# Altium PCB Speedometer_Tech.PcbDoc (part 4 of 4)
Units mm, origin at the board's own origin, x right, y up, seen from the top; angles counter-clockwise.
Board outline 309.2 x 103.7 mm, 4 copper layers (Top Layer, MidLayer1, MidLayer2, Bottom Layer), stack 0.603 mm thick; 246 components, 310 nets, 1253 pads, 701 vias.
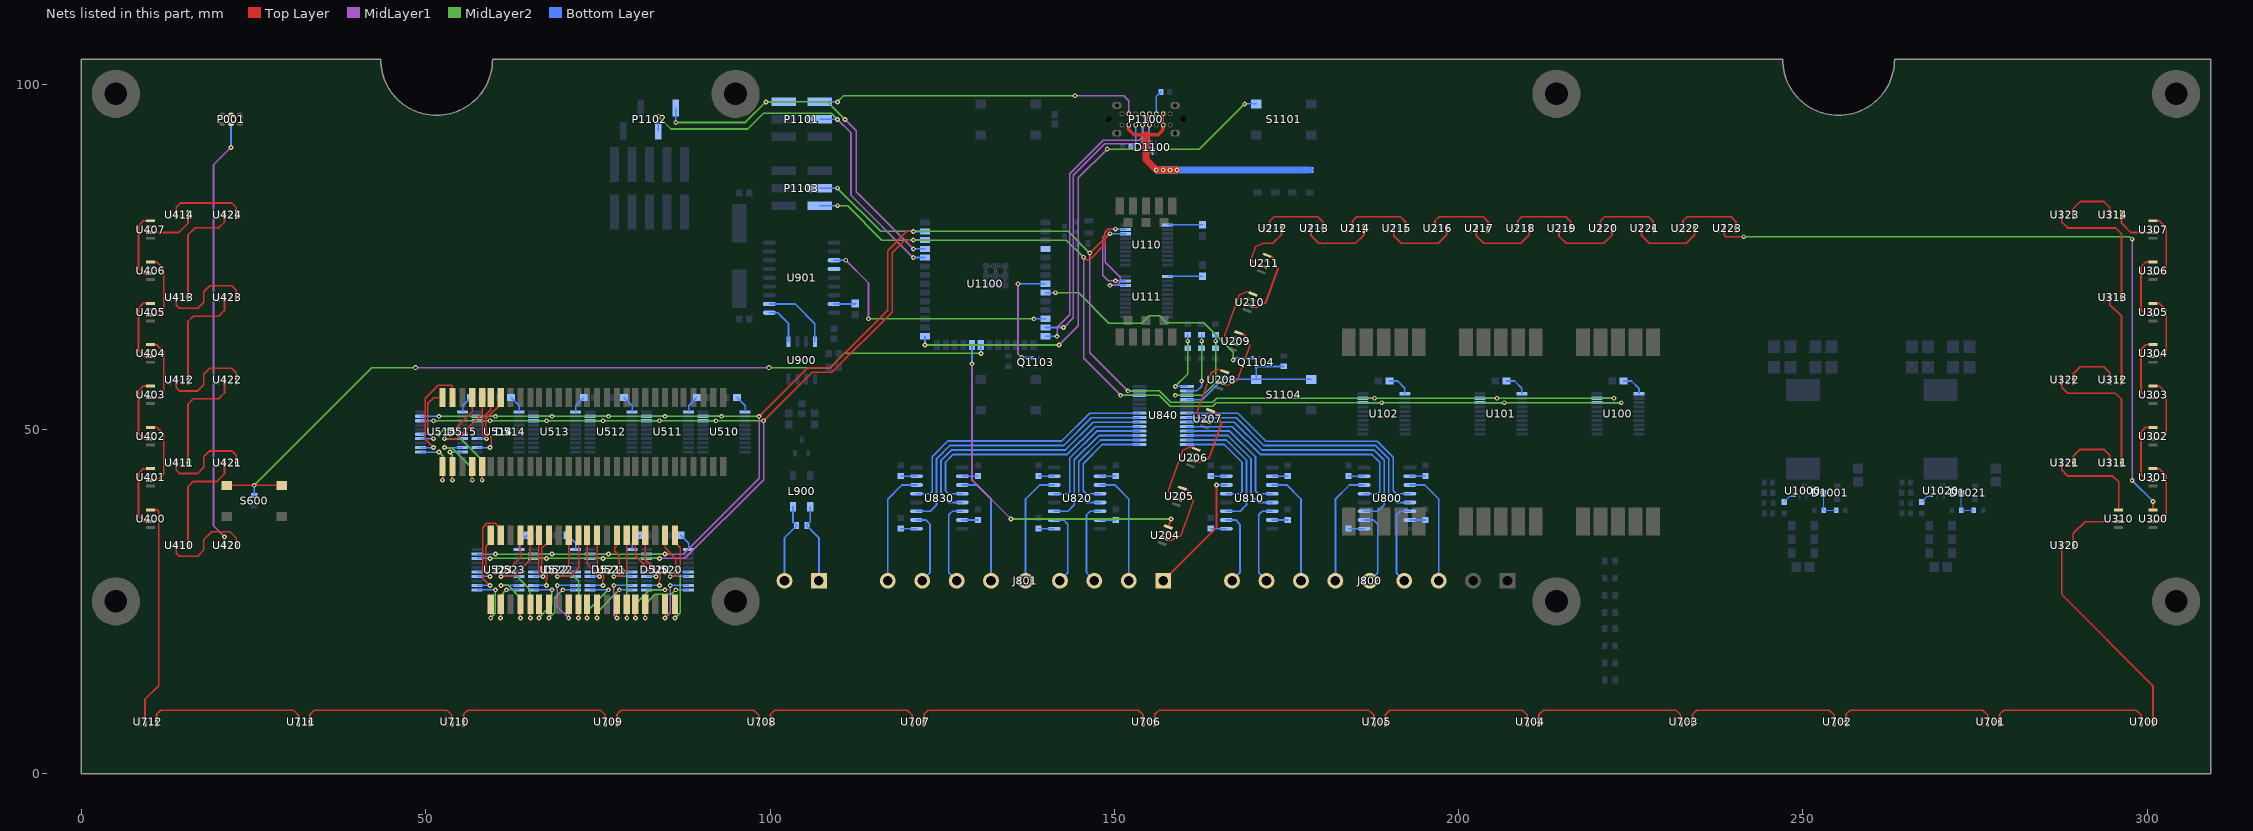
[diagram p5: the nets of this part, all layers, seen from the top]

## Via types
v1: diameter 0.7, hole 0.3, Top Layer to Bottom Layer, 568 vias
v2: diameter 0.6, hole 0.3, Top Layer to Bottom Layer, 96 vias
v3: diameter 1.27, hole 0.711, Top Layer to Bottom Layer, 33 vias
v4: diameter 0.7, hole 0.4, Top Layer to Bottom Layer, 4 vias

## Nets (pads, with @x,y where several pads share a name; then routed paths per layer and width w, separated by ;. In a path a pad name is that pad's centre, name@x,y a point inside that pad or via, vN(x,y) a via of type N, cw(c..) or ccw(c..) an arc to the next point about the centre after c; other vN are vias at no path point) (continued)
NetD514_9: D514.9 U514.12 | length 10.5
  Top Layer w0.2: v1(59.33,47.325) 59.33,47.46 59.48,47.61 59.48,48.894 59.1,49.275 59.061,49.275 58.68,49.656 58.68,51.494 59.061,51.875 59.105,51.875 60.88,53.65 D514.9@60.88,54.6
  Bottom Layer w0.2: U514.12@57.47,47.325 v1(59.33,47.325)
NetD514_10: D514.10 U514.14 | length 8
  Top Layer w0.2: 58.27,49.925 58.27,49.185 v1(58.83,48.625) ; 58.28,49.935 58.28,51.66 59.44,52.82 D514.10@59.44,54.6
  Bottom Layer w0.2: U514.14@57.47,48.625 v1(58.83,48.625)
NetD515_1: D515.1 U515.11 | length 8.9
  Top Layer w0.2: v1(52.44,42.6) D515.1@52.44,44.6
  MidLayer2 w0.2: v1(51.93,46.675) 52.44,46.165 v1(52.44,42.6)
  Bottom Layer w0.2: U515.11@49.27,46.675 v1(51.93,46.675)
NetD515_2: D515.2 U515.10 | length 8.1
  Top Layer w0.2: v1(53.88,42.6) D515.2@53.88,44.6
  MidLayer2 w0.2: v1(53.51,46.675) 53.88,46.305 v1(53.88,42.6)
  Bottom Layer w0.2: v1(53.51,46.675) U515.10@55.37,46.675
NetD515_4: D515.4 U515.9 | length 11.7
  Top Layer w0.2: v1(56.76,42.6) D515.4@56.76,44.6
  MidLayer2 w0.2: v1(52.71,47.325) 53.78,47.325 56.76,44.344 v1(56.76,42.6)
  Bottom Layer w0.2: v1(52.71,47.325) U515.9@55.37,47.325
NetD515_5: D515.5 U515.15 | length 15.9
  Top Layer w0.2: v1(58.2,42.6) D515.5@58.2,44.6
  MidLayer2 w0.2: v1(51.93,49.275) 52.58,49.925 53.241,49.925 53.78,49.925 58.2,45.504 v1(58.2,42.6)
  Bottom Layer w0.2: U515.15@49.27,49.275 v1(51.93,49.275)
NetD515_6: D515.6 U515.7 | length 12
  Top Layer w0.2: v1(52.71,48.625) 54.57,48.625 58.2,52.255 D515.6@58.2,54.6
  Bottom Layer w0.2: v1(52.71,48.625) U515.7@55.37,48.625
NetD515_7: D515.7 U515.6 | length 8.5
  Top Layer w0.2: v1(53.51,49.275) 56.76,52.525 D515.7@56.76,54.6
  Bottom Layer w0.2: v1(53.51,49.275) U515.6@55.37,49.275
NetD515_9: D515.9 U515.12 | length 16
  Top Layer w0.2: v1(51.13,47.325) 49.916,48.539 49.916,54.488 51.816,56.388 53.721,56.388 53.848,56.261 53.848,54.632 D515.9@53.88,54.6
  Bottom Layer w0.2: U515.12@49.27,47.325 v1(51.13,47.325)
NetD515_10: D515.10 U515.14 | length 10.3
  Top Layer w0.2: 50.316,49.925 50.316,49.439 ; v1(51.13,48.625) 50.316,49.439 ; D515.10@52.44,54.6 51.171,54.6 50.316,53.745 50.316,49.439
  Bottom Layer w0.2: U515.14@49.27,48.625 v1(51.13,48.625)
NetD520_1: D520.1 U520.11 | length 11.8
  Top Layer w0.2: v1(80.44,22.6) D520.1@80.44,24.6
  MidLayer2 w0.2: v1(80.44,22.6) 80.44,24.6 82.515,26.675 v1(84.73,26.675)
  Bottom Layer w0.2: U520.11@82.07,26.675 v1(84.73,26.675)
NetD520_2: D520.2 U520.10 | length 11.1
  Top Layer w0.2: v1(81.88,22.6) D520.2@81.88,24.6
  MidLayer2 w0.2: v1(81.88,22.6) 81.88,24.56 83.32,26 85.635,26 v1(86.31,26.675)
  Bottom Layer w0.2: v1(86.31,26.675) U520.10@88.17,26.675
NetD520_4: D520.4 U520.9 | length 9.7
  Top Layer w0.2: v1(84.76,22.6) D520.4@84.76,24.6
  MidLayer1 w0.2: v1(84.76,22.6) 85.51,23.35 v1(85.51,27.325)
  Bottom Layer w0.2: v1(85.51,27.325) U520.9@88.17,27.325
NetD520_5: D520.5 U520.15 | length 14.6
  Top Layer w0.2: v1(86.2,22.6) D520.5@86.2,24.6
  MidLayer2 w0.2: v1(84.73,29.275) 85.38,29.925 86.58,29.925 86.96,29.544 86.96,23.36 v1(86.2,22.6)
  Bottom Layer w0.2: U520.15@82.07,29.275 v1(84.73,29.275)
NetD520_6: D520.6 U520.7 | length 10.2
  Top Layer w0.2: v1(85.51,28.625) 86.58,28.625 86.96,29.006 86.96,32.794 86.55,33.204 86.55,34.25 D520.6@86.2,34.6
  Bottom Layer w0.2: v1(85.51,28.625) U520.7@88.17,28.625
NetD520_7: D520.7 U520.6 | length 7.8
  Top Layer w0.2: D520.7@84.76,34.6 84.76,32.764 86.31,31.214 v1(86.31,29.275)
  Bottom Layer w0.2: v1(86.31,29.275) U520.6@88.17,29.275
NetD520_9: D520.9 U520.12 | length 10.1
  Top Layer w0.2: D520.9@81.88,34.6 81.88,31.056 83.661,29.275 83.7,29.275 84.08,28.894 84.08,28.278 83.93,28.128 v1(83.93,27.325)
  Bottom Layer w0.2: U520.12@82.07,27.325 v1(83.93,27.325)
NetD520_10: D520.10 U520.14 | length 8.6
  Top Layer w0.2: D520.10@80.44,34.6 80.44,31.615 v1(83.43,28.625)
  Bottom Layer w0.2: U520.14@82.07,28.625 v1(83.43,28.625)
NetD521_1: D521.1 U521.11 | length 10
  Top Layer w0.2: v1(73.44,22.6) D521.1@73.44,24.6
  MidLayer2 w0.2: v1(73.44,22.6) 73.44,23.585 v1(76.53,26.675)
  Bottom Layer w0.2: U521.11@73.87,26.675 v1(76.53,26.675)
NetD521_2: D521.2 U521.10 | length 9.3
  Top Layer w0.2: v1(74.88,22.6) D521.2@74.88,24.6
  MidLayer2 w0.2: v1(74.88,22.6) 74.88,23.445 v1(78.11,26.675)
  Bottom Layer w0.2: v1(78.11,26.675) U521.10@79.97,26.675
NetD521_4: D521.4 U521.9 | length 9.6
  Top Layer w0.2: v1(77.76,22.6) D521.4@77.76,24.6
  MidLayer1 w0.2: v1(77.31,27.325) 77.31,23.05 v1(77.76,22.6)
  Bottom Layer w0.2: v1(77.31,27.325) U521.9@79.97,27.325
NetD521_5: D521.5 U521.15 | length 14.4
  Top Layer w0.2: v1(79.2,22.6) D521.5@79.2,24.6
  MidLayer2 w0.2: v1(76.53,29.275) 77.18,29.925 78.38,29.925 79.2,29.104 v1(79.2,22.6)
  Bottom Layer w0.2: U521.15@73.87,29.275 v1(76.53,29.275)
NetD521_6: D521.6 U521.7 | length 10
  Top Layer w0.2: v1(77.31,28.625) 78.38,28.625 79.2,29.446 D521.6@79.2,34.6
  Bottom Layer w0.2: v1(77.31,28.625) U521.7@79.97,28.625
NetD521_7: D521.7 U521.6 | length 7.6
  Top Layer w0.2: D521.7@77.76,34.6 77.683,34.523 77.683,33.017 77.46,32.794 77.46,32.256 78.11,31.606 v1(78.11,29.275)
  Bottom Layer w0.2: v1(78.11,29.275) U521.6@79.97,29.275
NetD521_9: D521.9 U521.12 | length 9.6
  Top Layer w0.2: D521.9@74.88,34.6 74.88,29.856 75.461,29.275 75.5,29.275 75.88,28.894 75.88,28.356 75.73,28.206 v1(75.73,27.325)
  Bottom Layer w0.2: U521.12@73.87,27.325 v1(75.73,27.325)
NetD521_10: D521.10 U521.14 | length 8.1
  Top Layer w0.2: D521.10@73.44,34.6 73.44,30.415 v1(75.23,28.625)
  Bottom Layer w0.2: U521.14@73.87,28.625 v1(75.23,28.625)
NetD522_1: D522.1 U522.11 | length 9.5
  Top Layer w0.2: v1(66.44,22.6) D522.1@66.44,24.6
  MidLayer2 w0.2: v1(66.44,22.6) 68.33,24.49 v1(68.33,26.675)
  Bottom Layer w0.2: U522.11@65.67,26.675 v1(68.33,26.675)
NetD522_2: D522.2 U522.10 | length 8.8
  Top Layer w0.2: v1(67.88,22.6) D522.2@67.88,24.6
  MidLayer2 w0.2: v1(67.88,22.6) 68.73,23.45 68.73,25.495 v1(69.91,26.675)
  Bottom Layer w0.2: v1(69.91,26.675) U522.10@71.77,26.675
NetD522_4: D522.4 U522.9 | length 10.1
  Top Layer w0.2: v1(70.76,22.6) D522.4@70.76,24.6
  MidLayer1 w0.2: v1(69.11,27.325) 69.11,24.25 v1(70.76,22.6)
  Bottom Layer w0.2: v1(69.11,27.325) U522.9@71.77,27.325
NetD522_5: D522.5 U522.15 | length 14.9
  Top Layer w0.2: v1(72.2,22.6) D522.5@72.2,24.6
  MidLayer2 w0.2: v1(68.33,29.275) 68.98,29.925 69.641,29.925 70.18,29.925 72.2,27.904 v1(72.2,22.6)
  Bottom Layer w0.2: U522.15@65.67,29.275 v1(68.33,29.275)
NetD522_6: D522.6 U522.7 | length 11
  Top Layer w0.2: v1(69.11,28.625) 70.97,28.625 72.2,29.855 D522.6@72.2,34.6
  Bottom Layer w0.2: v1(69.11,28.625) U522.7@71.77,28.625
NetD522_7: D522.7 U522.6 | length 7.5
  Top Layer w0.2: v1(69.91,29.275) 70.76,30.125 D522.7@70.76,34.6
  Bottom Layer w0.2: v1(69.91,29.275) U522.6@71.77,29.275
NetD522_9: D522.9 U522.12 | length 10
  Top Layer w0.2: v1(67.53,27.325) 67.53,28.206 67.68,28.356 67.68,28.894 67.3,29.275 67.261,29.275 66.88,29.656 66.88,32.76 67.421,33.3 67.53,33.3 67.88,33.65 D522.9@67.88,34.6
  Bottom Layer w0.2: U522.12@65.67,27.325 v1(67.53,27.325)
NetD522_10: D522.10 U522.14 | length 7.6
  Top Layer w0.2: D522.10@66.44,34.6 66.44,29.215 v1(67.03,28.625)
  Bottom Layer w0.2: U522.14@65.67,28.625 v1(67.03,28.625)
NetD523_1: D523.1 U523.11 | length 9
  Top Layer w0.2: v1(59.44,22.6) D523.1@59.44,24.6
  MidLayer2 w0.2: v1(59.44,22.6) 60.13,23.29 v1(60.13,26.675)
  Bottom Layer w0.2: U523.11@57.47,26.675 v1(60.13,26.675)
NetD523_2: D523.2 U523.10 | length 8.3
  Top Layer w0.2: v1(60.88,22.6) D523.2@60.88,24.6
  MidLayer2 w0.2: v1(60.88,22.6) 60.88,25.845 v1(61.71,26.675)
  Bottom Layer w0.2: v1(61.71,26.675) U523.10@63.57,26.675
NetD523_4: D523.4 U523.9 | length 11.2
  Top Layer w0.2: v1(63.76,22.6) D523.4@63.76,24.6
  MidLayer2 w0.2: v1(60.91,27.325) 61.98,27.325 63.76,25.544 v1(63.76,22.6)
  Bottom Layer w0.2: v1(60.91,27.325) U523.9@63.57,27.325
NetD523_5: D523.5 U523.15 | length 15.4
  Top Layer w0.2: v1(65.2,22.6) D523.5@65.2,24.6
  MidLayer2 w0.2: v1(60.13,29.275) 60.78,29.925 61.98,29.925 65.2,26.704 v1(65.2,22.6)
  Bottom Layer w0.2: U523.15@57.47,29.275 v1(60.13,29.275)
NetD523_6: D523.6 U523.7 | length 11.5
  Top Layer w0.2: v1(60.91,28.625) 62.77,28.625 65.2,31.055 D523.6@65.2,34.6
  Bottom Layer w0.2: v1(60.91,28.625) U523.7@63.57,28.625
NetD523_7: D523.7 U523.6 | length 8
  Top Layer w0.2: v1(61.71,29.275) 63.76,31.325 D523.7@63.76,34.6
  Bottom Layer w0.2: v1(61.71,29.275) U523.6@63.57,29.275
NetD523_9: D523.9 U523.12 | length 14.8
  Top Layer w0.2: v1(59.33,27.325) 58.27,28.385 58.27,28.801 58.28,28.811 58.28,35.714 58.888,36.322 60.071,36.322 60.493,35.9 60.53,35.9 60.88,35.55 D523.9@60.88,34.6
  Bottom Layer w0.2: U523.12@57.47,27.325 v1(59.33,27.325)
NetD523_10: D523.10 U523.14 | length 8.5
  Top Layer w0.2: v1(59.33,28.625) 58.68,29.275 58.68,32.965 59.016,33.3 59.09,33.3 59.44,33.65 D523.10@59.44,34.6
  Bottom Layer w0.2: U523.14@57.47,28.625 v1(59.33,28.625)
NetD1001_3: D1001.3 R1001.1 R1002.2 U1000.11 | length 5.9
  Bottom Layer w0.15: U1000.11@251.4,40.75 D1001.3@253,40.75 R1001.1@253,38.25 R1002.2@254.823,38.25
NetD1021_3: D1021.3 R1021.1 R1022.2 U1020.11 | length 5.9
  Bottom Layer w0.15: U1020.11@271.4,40.75 D1021.3@273,40.75 R1021.1@273,38.25 R1022.2@274.823,38.25
NetJ800_3: J800.3 U800.3 | length 16.9
  Bottom Layer w0.254: U800.3@192.925,41.905 192.93,41.91 195.048,41.91 197.1,39.858 J800.3@197.1,28
NetJ800_4: J800.4 U800.6 | length 12.2
  Bottom Layer w0.254: J800.4@192.1,28 190.962,29.138 190.962,37.55 191.499,38.088 192.918,38.088 U800.6@192.925,38.095
NetJ800_5: J800.5 U800.10 | length 10.9
  Bottom Layer w0.254: U800.10@186.275,36.825 187.622,36.825 188.238,36.208 188.238,29.138 J800.5@187.1,28
NetJ800_6: J800.6 U800.14 | length 16.9
  Bottom Layer w0.254: J800.6@182.105,27.995 182.105,39.853 184.157,41.905 U800.14@186.275,41.905
NetJ800_7: J800.7 U810.3 | length 16.9
  Bottom Layer w0.254: U810.3@172.925,41.905 172.93,41.91 175.048,41.91 177.1,39.858 J800.7@177.1,28
NetJ800_8: J800.8 U810.6 | length 12.2
  Bottom Layer w0.254: J800.8@172.1,28 170.962,29.138 170.962,37.55 171.499,38.088 172.918,38.088 U810.6@172.925,38.095
NetJ800_9: J800.9 U810.10 | length 10.9
  Bottom Layer w0.254: U810.10@166.275,36.825 167.622,36.825 168.238,36.208 168.238,29.138 J800.9@167.1,28
NetJ801_1: J801.1 U810.14 | length 18.5
  Top Layer w0.254: J801.1@157.1,28 164.85,35.75 v1(164.85,41.905)
  Bottom Layer w0.254: v1(164.85,41.905) U810.14@166.275,41.905
NetJ801_2: J801.2 U820.3 | length 16.9
  Bottom Layer w0.254: U820.3@147.925,41.905 147.93,41.91 150.048,41.91 152.1,39.858 J801.2@152.1,28
NetJ801_3: J801.3 U820.6 | length 12.2
  Bottom Layer w0.254: J801.3@147.1,28 145.962,29.138 145.962,37.55 146.499,38.088 147.918,38.088 U820.6@147.925,38.095
NetJ801_4: J801.4 U820.10 | length 10.9
  Bottom Layer w0.254: U820.10@141.275,36.825 142.622,36.825 143.238,36.208 143.238,29.138 J801.4@142.1,28
NetJ801_5: J801.5 U820.14 | length 16.9
  Bottom Layer w0.254: J801.5@137.1,28 137.1,39.848 139.152,41.9 U820.14@141.27,41.9
NetJ801_6: J801.6 U830.3 | length 16.9
  Bottom Layer w0.254: U830.3@127.925,41.905 127.93,41.91 130.048,41.91 132.1,39.858 J801.6@132.1,28
NetJ801_7: J801.7 U830.6 | length 12.2
  Bottom Layer w0.254: J801.7@127.1,28 125.962,29.138 125.962,37.55 126.499,38.088 127.918,38.088 U830.6@127.925,38.095
NetJ801_8: J801.8 U830.10 | length 10.9
  Bottom Layer w0.254: U830.10@121.275,36.825 122.622,36.825 123.238,36.208 123.238,29.138 J801.8@122.1,28
NetJ801_9: J801.9 U830.14 | length 16.9
  Bottom Layer w0.254: J801.9@117.1,28 117.1,39.848 119.152,41.9 U830.14@121.27,41.9
NetP001_2: P001.2 U420.3 | length 63.6
  Top Layer w0.254: U420.3@20.775,33.15 v1(20.775,34.37)
  MidLayer1 w0.254: v1(20.775,34.37) 19.177,35.968 19.177,88.392 v1(21.717,90.932) ; P001.2@21.717,94.992 P001.2@21.725,95
  Bottom Layer w0.254: v1(21.717,90.932) P001.2@21.717,94.992
NetP1100_A5: P1100.A5 R1101.1 | length 3.5
  Bottom Layer w0.254: R1101.1@152.415,91 152.415,91.064 152.656,91.304 152.719,91.304 153.1,91.685 P1100.A5@153.1,94.17
NetP1100_B5: P1100.B5 R1102.1 | length 3.5
  Bottom Layer w0.254: P1100.B5@156.1,95.82 156.1,98.315 156.481,98.696 156.544,98.696 156.785,98.936 R1102.1@156.785,99
NetQ1103_1: Q1103.1 U1100.8 | length 16.5
  MidLayer1 w0.254: v1(136.017,71.12) 136.017,60.939 v1(136.558,60.397)
  Bottom Layer w0.254: v1(136.017,71.12) 136.027,71.11 U1100.8@140,71.11 ; v1(136.558,60.397) Q1103.1@138.075,60.397
NetQ1104_1: Q1104.1 U1100.9 | length 35.8
  MidLayer2 w0.2: v1(141.479,69.825) 144.805,69.825 149.225,65.405 154.005,65.405 155.048,66.448 156.587,66.448 157.574,65.462 162.956,65.462 167.259,61.158 v1(167.259,60.071)
  Bottom Layer w0.2: U1100.9@140,69.84 v1@141.479,69.84 ; v1(167.259,60.071) 167.3,60.071 167.626,60.397 Q1104.1@170.125,60.397
NetQ1104_3: Q1104.3 R1104.1 S1104.3 S1104.4 U840.18 | length 25.1
  Bottom Layer w0.254: U840.18@160.55,54.275 162.775,54.275 165.75,57.25 S1104.3@170.625,57.25 ; R1104.1@174.6,59.15 174.552,59.102 Q1104.3@170.625,59.102 S1104.3@170.625,57.25 ; S1104.4@178.575,57.25 S1104.3@170.625,57.25
NetR100_1: R100.1 U100.1 | length 3.5
  Bottom Layer w0.254: R100.1@223.949,57 225.108,57 226.183,55.925 U100.1@226.183,55.15
NetR101_1: R101.1 U101.1 | length 3.5
  Bottom Layer w0.254: R101.1@206.949,57 208.108,57 209.183,55.925 U101.1@209.183,55.15
NetR102_1: R102.1 U102.1 | length 3.5
  Bottom Layer w0.254: R102.1@189.949,57 191.133,57 192.109,56.024 192.183,55.95 U102.1@192.183,55.15
NetR110_1: R110.1 U110.1 | length 5.1
  Bottom Layer w0.2: U110.1@157.736,79.68 162.811,79.68 R110.1@162.814,79.682
NetR111_1: R111.1 U111.1 | length 5.1
  Bottom Layer w0.2: U111.1@157.736,72.187 162.791,72.187 R111.1@162.814,72.21
NetR510_1: R510.1 U510.1 | length 2.6
  Bottom Layer w0.2: R510.1@95.186,54.6 95.222,54.6 95.653,54.169 95.653,54.132 96.37,53.415 U510.1@96.37,52.525
NetR511_1: R511.1 U511.1 | length 2.6
  Bottom Layer w0.2: U511.1@88.17,52.525 88.17,53.416 88.887,54.132 88.887,54.169 89.318,54.6 R511.1@89.355,54.6
NetR512_1: R512.1 U512.1 | length 2.6
  Bottom Layer w0.2: R512.1@78.786,54.6 78.822,54.6 79.253,54.169 79.253,54.132 79.97,53.415 U512.1@79.97,52.525
NetR513_1: R513.1 U513.1 | length 2.6
  Bottom Layer w0.2: U513.1@71.77,52.525 71.77,53.415 72.487,54.132 72.487,54.169 72.918,54.6 R513.1@72.955,54.6
NetR514_1: R514.1 U514.1 | length 2.6
  Bottom Layer w0.2: R514.1@62.386,54.6 62.422,54.6 62.853,54.169 62.853,54.132 63.57,53.415 U514.1@63.57,52.525
NetR515_1: R515.1 U515.1 | length 2.6
  Bottom Layer w0.2: U515.1@55.37,52.525 55.37,53.415 56.087,54.132 56.087,54.169 56.518,54.6 R515.1@56.555,54.6
NetR520_1: R520.1 U520.1 | length 2.6
  Bottom Layer w0.2: R520.1@86.986,34.6 87.022,34.6 87.453,34.169 87.453,34.132 88.17,33.415 U520.1@88.17,32.525
NetR521_1: R521.1 U521.1 | length 2.6
  Bottom Layer w0.2: U521.1@79.97,32.525 79.97,33.415 80.687,34.132 80.687,34.169 81.118,34.6 R521.1@81.155,34.6
NetR522_1: R522.1 U522.1 | length 2.6
  Bottom Layer w0.2: R522.1@70.586,34.6 70.622,34.6 71.053,34.169 71.053,34.132 71.77,33.415 U522.1@71.77,32.525
NetR523_1: R523.1 U523.1 | length 2.6
  Bottom Layer w0.2: U523.1@63.57,32.525 63.57,33.415 64.287,34.132 64.287,34.169 64.718,34.6 R523.1@64.755,34.6
NetR600_2: R600.2 S600.1 S600.2 U1100.21 | length 124.1
  Top Layer w0.2: S600.1@21.125,41.85 v1(25.1,41.85) S600.2@29.075,41.85
  MidLayer1 w0.2: v4(48.514,58.943) v4(99.837,58.943)
  MidLayer2 w0.2: v1(25.1,41.85) 42.193,58.943 v4(48.514,58.943) ; v4(99.837,58.943) 108.727,58.943 110.779,60.995 v1(130.615,60.995)
  Bottom Layer w0.2: R600.2@25.1,40.35 v1(25.1,41.85)
  Bottom Layer w0.254: v1(130.615,60.995) U1100.21@130.615,62.24
NetR800_2: R800.2 U800.2 | length 2.3
  Bottom Layer w0.254: U800.2@192.925,43.175 R800.2@195.2,43.175
NetR801_2: R801.2 U800.7 | length 2.3
  Bottom Layer w0.254: U800.7@192.925,36.825 195.181,36.825 R801.2@195.2,36.806
NetR802_2: R802.2 U800.9 | length 2.3
  Bottom Layer w0.254: R802.2@184,35.555 U800.9@186.275,35.555
NetR803_2: R803.2 U800.15 | length 2.3
  Bottom Layer w0.254: R803.2@184,43.175 U800.15@186.275,43.175
NetR810_2: R810.2 U810.2 | length 2.3
  Bottom Layer w0.254: U810.2@172.925,43.175 R810.2@175.2,43.175
NetR811_2: R811.2 U810.7 | length 2.3
  Bottom Layer w0.254: U810.7@172.925,36.825 175.181,36.825 R811.2@175.2,36.806
NetR812_2: R812.2 U810.9 | length 2.3
  Bottom Layer w0.254: R812.2@164,35.555 U810.9@166.275,35.555
NetR813_2: R813.2 U810.15 | length 2.3
  Bottom Layer w0.254: R813.2@164,43.175 U810.15@166.275,43.175
NetR820_2: R820.2 U820.2 | length 2.3
  Bottom Layer w0.254: U820.2@147.925,43.175 R820.2@150.2,43.175
NetR821_2: R821.2 U820.7 | length 2.3
  Bottom Layer w0.254: U820.7@147.925,36.825 150.181,36.825 R821.2@150.2,36.806
NetR822_2: R822.2 U820.9 | length 2.3
  Bottom Layer w0.254: R822.2@139,35.555 U820.9@141.275,35.555
NetR823_2: R823.2 U820.15 | length 2.3
  Bottom Layer w0.254: R823.2@139,43.175 U820.15@141.275,43.175
NetR830_2: R830.2 U830.2 | length 2.3
  Bottom Layer w0.254: U830.2@127.925,43.175 R830.2@130.2,43.175
NetR831_2: R831.2 U830.7 | length 2.3
  Bottom Layer w0.254: U830.7@127.925,36.825 130.181,36.825 R831.2@130.2,36.806
NetR832_2: R832.2 U830.9 | length 2.3
  Bottom Layer w0.254: R832.2@119,35.555 U830.9@121.275,35.555
NetR833_2: R833.2 U830.15 | length 2.3
  Bottom Layer w0.254: R833.2@119,43.175 U830.15@121.275,43.175
NetR840_1: R840.1 R843.2 U840.15 | length 10.9
  MidLayer2 w0.254: v1(158.855,56.225) 160.655,58.025 v1(160.655,62.779)
  Bottom Layer w0.254: v1(158.855,56.225) U840.15@160.55,56.225 ; R843.2@160.655,61.806 v1(160.655,62.779) R840.1@160.655,63.735
NetR841_1: R841.1 R844.2 U840.16 | length 10.9
  MidLayer2 w0.254: v1(162.687,57.023) v1(162.687,62.779)
  Bottom Layer w0.254: U840.16@160.55,55.575 162.001,55.575 162.687,56.261 v1(162.687,57.023) ; R844.2@162.687,61.806 v1(162.687,62.779) R841.1@162.687,63.735
NetR842_1: R842.1 R845.2 U840.17 | length 16.3
  MidLayer2 w0.254: v1(158.855,54.925) 162.875,54.925 164.719,56.769 v1(164.719,62.779)
  Bottom Layer w0.254: v1(158.855,54.925) U840.17@160.55,54.925 ; R845.2@164.719,61.806 v1(164.719,62.779) R842.1@164.719,63.735
NetR903_1: R903.1 U901.17 | length 3.1
  Bottom Layer w0.254: U901.17@109.3,68.19 112.333,68.19 R903.1@112.395,68.252
NetR1003_2: R1003.2 U1000.3 | length 1.7
  Bottom Layer w0.15: R1003.2@247.269,39.45 247.269,39.5 247.594,39.825 247.644,39.825 248.069,40.25 U1000.3@248.6,40.25
NetR1023_2: R1023.2 U1020.3 | length 1.7
  Bottom Layer w0.15: R1023.2@267.269,39.45 267.269,39.5 267.594,39.825 267.644,39.825 268.069,40.25 U1020.3@268.6,40.25
NetS1101_3: S1101.3 U1100.27 | length 76.4
  MidLayer1 w0.2: v1(141.971,62.245) 144.78,65.054 144.78,86.487 v1(148.971,90.678)
  MidLayer2 w0.2: v1(148.971,90.678) 162.358,90.678 v1(168.93,97.25)
  MidLayer2 w0.254: v1(122.5,62.245) v1(141.971,62.245)
  Bottom Layer w0.254: v1(122.5,62.245) U1100.27@122.5,63.49 ; v1(168.93,97.25) S1101.3@170.625,97.25
NetU204_1: U204.1 U1100.22 | length 52.1
  Top Layer w0.254: U204.1@157.819,35.803 v1(158.236,36.95)
  MidLayer1 w0.254: v1(129.345,59.495) 129.345,42.613 v1(135.001,36.957)
  MidLayer2 w0.254: v1(135.001,36.957) 135.008,36.95 v1(158.236,36.95)
  Bottom Layer w0.254: v1(129.345,59.495) U1100.22@129.345,62.24
NetU204_3: U204.3 U205.1 | length 10.6
  Top Layer w0.254: U204.3@157.237,34.206 158.226,33.846 159.633,34.502 161.466,39.537 160.722,41.132 U205.1@159.871,41.441
NetU205_3: U205.3 U206.1 | length 10.4
  Top Layer w0.254: U205.3@159.289,39.844 158.265,40.217 157.841,41.127 159.955,46.937 160.99,47.419 U206.1@161.923,47.079
NetU206_3: U206.3 U207.1 | length 10.6
  Top Layer w0.254: U206.3@161.341,45.482 162.33,45.122 163.737,45.778 165.57,50.813 164.826,52.408 U207.1@163.975,52.717
NetU207_3: U207.3 U208.1 | length 10.4
  Top Layer w0.254: U207.3@163.393,51.12 162.369,51.493 161.962,52.365 164.097,58.23 165.094,58.695 U208.1@166.027,58.355
NetU208_3: U208.3 U209.1 | length 10.6
  Top Layer w0.254: U208.3@165.445,56.758 166.434,56.398 167.841,57.054 169.674,62.089 168.93,63.684 U209.1@168.079,63.993
NetU209_3: U209.3 U210.1 | length 10.4
  Top Layer w0.254: U209.3@167.497,62.396 166.473,62.769 166.032,63.715 168.127,69.472 169.198,69.971 U210.1@170.131,69.631
NetU210_3: U210.3 U211.1 | length 10.6
  Top Layer w0.254: U210.3@169.549,68.034 170.538,67.674 171.945,68.33 173.778,73.365 173.034,74.96 U211.1@172.183,75.269
NetU211_3: U211.3 U212.1 | length 9.3
  Top Layer w0.254: U211.3@171.601,73.672 170.168,74.193 169.895,74.781 170.519,76.496 171.6,77 173.018,77 174.275,78.257 U212.1@174.275,79.15
NetU212_3: U212.3 U213.1 | length 10.3
  Top Layer w0.254: U212.3@172.575,79.15 172.575,80.24 173.185,80.85 179.568,80.85 180.275,80.143 U213.1@180.275,79.15
NetU213_3: U213.3 U214.1 | length 10.6
  Top Layer w0.254: U213.3@178.575,79.15 178.575,78.098 179.673,77 185.03,77 186.275,78.245 U214.1@186.275,79.15
NetU214_3: U214.3 U215.1 | length 10.3
  Top Layer w0.254: U214.3@184.575,79.15 184.575,80.24 185.185,80.85 191.568,80.85 192.275,80.143 U215.1@192.275,79.15
NetU215_3: U215.3 U216.1 | length 10.6
  Top Layer w0.254: U215.3@190.575,79.15 190.575,78.098 191.673,77 197.03,77 198.275,78.245 U216.1@198.275,79.15
NetU216_3: U216.3 U217.1 | length 10.3
  Top Layer w0.254: U216.3@196.575,79.15 196.575,80.24 197.185,80.85 203.568,80.85 204.275,80.143 U217.1@204.275,79.15
NetU217_3: U217.3 U218.1 | length 10.6
  Top Layer w0.254: U217.3@202.575,79.15 202.575,78.098 203.673,77 209.03,77 210.275,78.245 U218.1@210.275,79.15
NetU218_3: U218.3 U219.1 | length 10.3
  Top Layer w0.254: U218.3@208.575,79.15 208.575,80.24 209.185,80.85 215.568,80.85 216.275,80.143 U219.1@216.275,79.15
NetU219_3: U219.3 U220.1 | length 10.7
  Top Layer w0.254: U219.3@214.575,79.15 214.575,78.033 215.608,77 221.1,77 222.275,78.175 U220.1@222.275,79.15
NetU220_3: U220.3 U221.1 | length 10.3
  Top Layer w0.254: U220.3@220.575,79.15 220.575,80.24 221.185,80.85 227.568,80.85 228.275,80.143 U221.1@228.275,79.15
NetU221_3: U221.3 U222.1 | length 10.6
  Top Layer w0.254: U221.3@226.575,79.15 226.575,78.098 227.673,77 233.03,77 234.275,78.245 U222.1@234.275,79.15
NetU222_3: U222.3 U223.1 | length 10.3
  Top Layer w0.254: U222.3@232.575,79.15 232.575,80.24 233.185,80.85 239.568,80.85 240.275,80.143 U223.1@240.275,79.15
NetU223_3: U223.3 U300.1 | length 101
  Top Layer w0.254: U223.3@238.575,79.15 238.575,78.193 238.81,77.958 v1(241.408,77.958) ; U300.1@300.85,38.275 v1(300.85,39.495)
  MidLayer1 w0.254: v1(297.815,42.53) v1(297.815,77.597)
  MidLayer2 w0.254: v1@241.419,77.958 297.443,77.958 297.804,77.597 v1(297.815,77.597)
  Bottom Layer w0.254: v1(297.815,42.53) v1(300.85,39.495)
NetU300_3: U300.3 U301.1 | length 10.4
  Top Layer w0.254: U300.3@300.85,36.575 301.902,36.575 302.768,37.441 302.768,43.262 301.755,44.275 U301.1@300.85,44.275
NetU301_3: U301.3 U302.1 | length 10.3
  Top Layer w0.254: U301.3@300.85,42.575 299.945,42.575 299.085,43.435 299.085,49.562 299.798,50.275 U302.1@300.85,50.275
NetU302_3: U302.3 U303.1 | length 10.4
  Top Layer w0.254: U302.3@300.85,48.575 301.902,48.575 302.768,49.441 302.768,55.262 301.755,56.275 U303.1@300.85,56.275
NetU303_3: U303.3 U304.1 | length 10.3
  Top Layer w0.254: U303.3@300.85,54.575 299.945,54.575 299.085,55.435 299.085,61.562 299.798,62.275 U304.1@300.85,62.275
NetU304_3: U304.3 U305.1 | length 10.4
  Top Layer w0.254: U304.3@300.85,60.575 301.902,60.575 302.768,61.441 302.768,67.262 301.755,68.275 U305.1@300.85,68.275
NetU305_3: U305.3 U306.1 | length 10.3
  Top Layer w0.254: U305.3@300.85,66.575 299.945,66.575 299.085,67.435 299.085,73.562 299.798,74.275 U306.1@300.85,74.275
NetU306_3: U306.3 U307.1 | length 10.4
  Top Layer w0.254: U306.3@300.85,72.575 301.902,72.575 302.768,73.441 302.768,79.262 301.755,80.275 U307.1@300.85,80.275
NetU307_3: U307.3 U314.1 | length 6.4
  Top Layer w0.254: U314.1@296.275,81.15 296.275,79.9 297.6,78.575 U307.3@300.85,78.575
NetU310_1: U310.1 U321.3 | length 14.1
  Top Layer w0.254: U321.3@287.575,45.15 287.575,44.098 288.478,43.195 295.006,43.195 295.85,42.351 U310.1@295.85,38.275
NetU310_3: U310.3 U320.1 | length 9
  Top Layer w0.254: U320.1@289.275,33.15 289.275,34.87 290.98,36.575 U310.3@295.85,36.575
NetU311_1: U311.1 U322.3 | length 19.7
  Top Layer w0.254: U322.3@287.575,57.15 287.575,56.098 288.441,55.232 295.402,55.232 296.268,54.366 ; U311.1@296.275,45.15 296.275,54.366
NetU311_3: U311.3 U321.1 | length 8
  Top Layer w0.254: U321.1@289.275,45.15 289.275,46.055 290.288,47.068 293.709,47.068 294.575,46.202 U311.3@294.575,45.15
NetU312_1: U312.1 U313.3 | length 12.7
  Top Layer w0.254: U313.3@294.575,69.15 294.575,68.098 296.275,66.398 U312.1@296.275,57.15
NetU312_3: U312.3 U322.1 | length 8
  Top Layer w0.254: U322.1@289.275,57.15 289.275,58.055 290.288,59.068 293.709,59.068 294.575,58.202 U312.3@294.575,57.15
NetU313_1: U313.1 U323.3 | length 19.7
  Top Layer w0.254: U323.3@287.575,81.15 287.575,80.098 288.441,79.232 295.402,79.232 296.268,78.366 ; U313.1@296.275,69.15 296.275,78.366
NetU314_3: U314.3 U323.1 | length 8
  Top Layer w0.254: U323.1@289.275,81.15 289.275,82.055 290.288,83.068 293.709,83.068 294.575,82.202 U314.3@294.575,81.15
NetU320_3: U320.3 U700.1 | length 31.1
  Top Layer w0.254: U320.3@287.575,33.15 287.575,25.988 300.831,12.732 U700.1@300.831,7.5
NetU400_1: U400.1 U712.3 | length 32.7
  Top Layer w0.254: U712.3@9.219,7.5 9.219,10.743 11.242,12.766 11.242,38.069 11.036,38.275 U400.1@10.05,38.275
NetU400_3: U400.3 U401.1 | length 10.3
  Top Layer w0.254: U400.3@10.05,36.575 9.145,36.575 8.285,37.435 8.285,43.562 8.998,44.275 U401.1@10.05,44.275
NetU401_3: U401.3 U402.1 | length 10.4
  Top Layer w0.254: U401.3@10.05,42.575 11.102,42.575 11.968,43.441 11.968,49.262 10.955,50.275 U402.1@10.05,50.275
NetU402_3: U402.3 U403.1 | length 10.3
  Top Layer w0.254: U402.3@10.05,48.575 9.145,48.575 8.285,49.435 8.285,55.562 8.998,56.275 U403.1@10.05,56.275
NetU403_3: U403.3 U404.1 | length 10.4
  Top Layer w0.254: U403.3@10.05,54.575 11.102,54.575 11.968,55.441 11.968,61.262 10.955,62.275 U404.1@10.05,62.275
NetU404_3: U404.3 U405.1 | length 10.3
  Top Layer w0.254: U404.3@10.05,60.575 9.145,60.575 8.285,61.435 8.285,67.562 8.998,68.275 U405.1@10.05,68.275
NetU405_3: U405.3 U406.1 | length 10.4
  Top Layer w0.254: U405.3@10.05,66.575 11.102,66.575 11.968,67.441 11.968,73.262 10.955,74.275 U406.1@10.05,74.275
NetU406_3: U406.3 U407.1 | length 10.3
  Top Layer w0.254: U406.3@10.05,72.575 9.145,72.575 8.285,73.435 8.285,79.562 8.998,80.275 U407.1@10.05,80.275
NetU407_3: U407.3 U414.1 | length 7.2
  Top Layer w0.254: U407.3@10.05,78.575 14.15,78.575 15.475,79.9 U414.1@15.475,81.15
NetU410_1: U410.1 U421.3 | length 16.2
  Top Layer w0.254: U410.1@15.475,33.15 15.475,41.64 16.256,42.421 19.688,42.421 20.775,43.508 U421.3@20.775,45.15
NetU410_3: U410.3 U420.1 | length 13.8
  Top Layer w0.254: U410.3@13.775,33.15 13.775,32.013 14.224,31.564 16.891,31.564 17.78,32.453 17.78,33.977 18.903,35.1 21.573,35.1 22.475,34.198 U420.1@22.475,33.15
NetU411_1: U411.1 U422.3 | length 16.4
  Top Layer w0.254: U411.1@15.475,45.15 15.475,53.64 16.256,54.421 19.939,54.421 20.775,55.257 U422.3@20.775,57.15
NetU411_3: U411.3 U421.1 | length 13.6
  Top Layer w0.254: U411.3@13.775,45.15 13.775,44.013 14.224,43.564 16.891,43.564 17.78,44.453 17.78,45.977 18.653,46.85 21.823,46.85 22.475,46.198 U421.1@22.475,45.15
NetU412_1: U412.1 U423.3 | length 16.4
  Top Layer w0.254: U412.1@15.475,57.15 15.475,65.64 16.256,66.421 19.939,66.421 20.775,67.257 U423.3@20.775,69.15
NetU412_3: U412.3 U422.1 | length 13.6
  Top Layer w0.254: U412.3@13.775,57.15 13.775,56.013 14.224,55.564 16.891,55.564 17.78,56.453 17.78,57.977 18.653,58.85 21.823,58.85 22.475,58.198 U422.1@22.475,57.15
NetU413_1: U413.1 U424.3 | length 16.2
  Top Layer w0.254: U413.1@15.475,69.15 15.475,78.213 16.51,79.248 19.893,79.248 19.909,79.232 20.775,80.098 U424.3@20.775,81.15
NetU413_3: U413.3 U423.1 | length 13.6
  Top Layer w0.254: U413.3@13.775,69.15 13.775,68.013 14.224,67.564 16.891,67.564 17.78,68.453 17.78,69.977 18.653,70.85 21.823,70.85 22.475,70.198 U423.1@22.475,69.15
NetU414_3: U414.3 U424.1 | length 11.4
  Top Layer w0.254: U414.3@13.775,81.15 13.775,82.228 14.397,82.85 21.823,82.85 22.475,82.198 U424.1@22.475,81.15
NetU700_3: U700.3 U701.1 | length 23.2
  Top Layer w0.254: U701.1@278.544,7.5 278.544,8.59 279.154,9.2 298.424,9.2 299.131,8.493 U700.3@299.131,7.5
NetU701_3: U701.3 U702.1 | length 23.2
  Top Layer w0.254: U702.1@256.257,7.5 256.257,8.59 256.867,9.2 276.137,9.2 276.844,8.493 U701.3@276.844,7.5
NetU702_3: U702.3 U703.1 | length 23.2
  Top Layer w0.254: U703.1@233.97,7.5 233.97,8.59 234.581,9.2 253.85,9.2 254.557,8.493 U702.3@254.557,7.5
NetU703_3: U703.3 U704.1 | length 23.2
  Top Layer w0.254: U704.1@211.684,7.5 211.684,8.59 212.294,9.2 231.563,9.2 232.27,8.493 U703.3@232.27,7.5
NetU704_3: U704.3 U705.1 | length 23.2
  Top Layer w0.254: U705.1@189.397,7.5 189.397,8.59 190.007,9.2 209.276,9.2 209.983,8.493 U704.3@209.983,7.5
NetU705_3: U705.3 U706.1 | length 34.3
  Top Layer w0.254: U706.1@155.875,7.5 155.875,8.59 156.485,9.2 ; 156.59,9.2 186.989,9.2 187.697,8.493 U705.3@187.697,7.5
NetU706_3: U706.3 U707.1 | length 34.3
  Top Layer w0.254: U707.1@122.353,7.5 122.353,8.59 122.963,9.2 ; 123.068,9.2 153.468,9.2 154.175,8.493 U706.3@154.175,7.5
NetU707_3: U707.3 U708.1 | length 23.2
  Top Layer w0.254: U708.1@100.066,7.5 100.066,8.59 100.676,9.2 119.946,9.2 120.653,8.493 U707.3@120.653,7.5
NetU708_3: U708.3 U709.1 | length 23.2
  Top Layer w0.254: U709.1@77.779,7.5 77.779,8.59 78.39,9.2 97.659,9.2 98.366,8.493 U708.3@98.366,7.5
NetU709_3: U709.3 U710.1 | length 23.2
  Top Layer w0.254: U710.1@55.493,7.5 55.493,8.59 56.103,9.2 75.372,9.2 76.079,8.493 U709.3@76.079,7.5
NetU710_3: U710.3 U711.1 | length 23.2
  Top Layer w0.254: U711.1@33.206,7.5 33.206,8.59 33.816,9.2 53.085,9.2 53.792,8.493 U710.3@53.792,7.5
NetU711_3: U711.3 U712.1 | length 23.2
  Top Layer w0.254: U712.1@10.919,7.5 10.919,8.59 11.529,9.2 30.798,9.2 31.505,8.493 U711.3@31.505,7.5
NetU901_12: U901.12 U1100.12 | length 37.3
  MidLayer1 w0.254: v1(110.995,74.54) 114.3,71.235 v1(114.3,66.04)
  MidLayer2 w0.254: v1(114.3,66.04) 114.31,66.03 v1(138.305,66.03)
  Bottom Layer w0.254: U901.12@109.3,74.54 v1(110.995,74.54) ; v1(138.305,66.03) U1100.12@140,66.03
RX: P1101.3 P1102.2 U1100.36 | length 59.1
  MidLayer1 w0.254: v1(109.789,95) 111.76,93.029 111.76,83.965 v1(120.805,74.92)
  MidLayer2 w0.254: v1(83.77,95.445) 85.616,93.599 96.774,93.599 99.06,95.885 108.904,95.885 v1(109.789,95)
  Bottom Layer w0.254: P1102.2@83.77,93.345 v1(83.77,95.445) ; P1101.3@107.205,95 v1(109.789,95) ; v1(120.805,74.92) U1100.36@122.5,74.92
RXCAN: U900.4 U901.2 | length 10.4
  Bottom Layer w0.254: U901.2@99.9,68.19 103.641,68.19 106.505,65.326 U900.4@106.505,62.7
SCK: U1100.4
SCL: P1103.5 U100.18 U101.18 U102.18 U110.18 U111.18 U510.18 U511.18 U512.18 U513.18 U514.18 U515.18 U520.18 U521.18 U522.18 U523.18 U840.12 U1100.38 | length 329.3
  Top Layer w0.2: v1@99.057,51.227 106.123,58.293 108.996,58.293 117.714,67.011 117.714,75.639 119.535,77.46 v1(120.805,77.46) ; v1(145.542,74.969) 145.572,74.969 145.909,74.631 146.431,74.631 148.707,76.907 148.707,77.745 v1(149.357,78.395)
  MidLayer1 w0.2: v1(83.93,31.225) 87.643,31.225 99.06,42.642 v1@99.06,51.225 ; v1(145.542,74.969) 145.542,60.288 v1(150.905,54.925) ; v1(149.357,70.902) 149.888,70.902 150.426,70.902 150.807,71.282 150.807,71.508 150.836,71.537 150.836,72.096 148.707,74.225 148.707,77.745 v1(149.357,78.395)
  MidLayer2 w0.2: v1(51.13,51.225) v1(59.33,51.225) v1(67.53,51.225) v1(75.73,51.225) v1(83.93,51.225) v1(92.13,51.225) v1(99.055,51.225) ; v1(59.33,31.225) v1(67.53,31.225) v1(75.73,31.225) v1(83.93,31.225) ; v1(109.789,82.46) 109.826,82.423 111.252,82.423 116.215,77.46 v1(120.805,77.46) 143.051,77.46 v1(145.542,74.969) ; v1(150.905,54.925) 156.53,54.925 158.115,53.34 164.282,53.34 164.792,53.85 v1(188.828,53.85) v1(206.628,53.85) v1(223.628,53.85)
  Bottom Layer w0.2: U515.18@49.27,51.225 v1(51.13,51.225) ; U523.18@57.47,31.225 v1(59.33,31.225) ; U514.18@57.47,51.225 v1(59.33,51.225) ; U522.18@65.67,31.225 v1(67.53,31.225) ; U513.18@65.67,51.225 v1(67.53,51.225) ; U521.18@73.87,31.225 v1(75.73,31.225) ; U512.18@73.87,51.225 v1(75.73,51.225) ; U520.18@82.07,31.225 v1(83.93,31.225) ; U511.18@82.07,51.225 v1(83.93,51.225) ; U510.18@90.27,51.225 v1(92.13,51.225) ; v1@149.357,70.887 U111.18@151.636,70.887 ; v1@149.357,78.38 U110.18@151.636,78.38
  Bottom Layer w0.254: P1103.5@107.205,82.46 v1(109.789,82.46) ; v1(120.805,77.46) U1100.38@122.5,77.46 ; v1(150.905,54.925) U840.12@153.65,54.925 ; U102.18@186.083,53.85 v1(188.828,53.85) ; U101.18@203.083,53.85 v1(206.628,53.85) ; U100.18@220.083,53.85 v1(223.628,53.85)
SCLK: U901.13
SDA: P1103.3 U100.19 U101.19 U102.19 U110.19 U111.19 U510.19 U511.19 U512.19 U513.19 U514.19 U515.19 U520.19 U521.19 U522.19 U523.19 U840.13 U1100.39 | length 329.4
  Top Layer w0.2: v1(98.407,51.875) 105.475,58.943 108.727,58.943 117.064,67.28 117.064,75.908 119.886,78.73 v1(120.805,78.73) ; v1(146.431,75.59) 148.307,77.466 148.307,77.91 148.59,78.193 148.59,78.547 149.088,79.045 v1(150.157,79.045)
  MidLayer1 w0.2: v1(84.73,31.875) 87.374,31.875 98.41,42.911 v1@98.41,51.872 ; v1(98.407,51.875) v1@98.41,51.872 ; v1@98.41,51.875 v1@98.41,51.872 ; v1(146.431,75.59) 146.431,61.099 v1(151.955,55.575) ; v1(150.157,71.552) 149.088,71.552 148.307,72.332 148.307,77.91 148.59,78.193 148.59,78.547 149.088,79.045 149.626,79.045 v1(150.157,79.045)
  MidLayer2 w0.2: v1(51.93,51.875) v1(60.13,51.875) v1(68.33,51.875) v1(76.53,51.875) v1(84.73,51.875) v1(92.93,51.875) v1(98.407,51.875) ; v1(60.13,31.875) v1(68.33,31.875) v1(76.53,31.875) v1(84.73,31.875) ; v1(109.789,85) 116.059,78.73 v1(120.805,78.73) 143.291,78.73 v1(146.431,75.59) ; v1(151.955,55.575) 156.515,55.575 158.196,53.894 164.27,53.894 164.877,54.5 v1(187.778,54.5) v1(205.578,54.5) v1(222.578,54.5)
  Bottom Layer w0.2: U515.19@49.27,51.875 v1(51.93,51.875) ; U523.19@57.47,31.875 v1(60.13,31.875) ; U514.19@57.47,51.875 v1(60.13,51.875) ; U522.19@65.67,31.875 v1(68.33,31.875) ; U513.19@65.67,51.875 v1(68.33,51.875) ; U521.19@73.87,31.875 v1(76.53,31.875) ; U512.19@73.87,51.875 v1(76.53,51.875) ; U520.19@82.07,31.875 v1(84.73,31.875) ; U511.19@82.07,51.875 v1(84.73,51.875) ; U510.19@90.27,51.875 v1(92.93,51.875) ; v1@150.157,71.537 U111.19@151.636,71.537 ; v1@150.157,79.03 U110.19@151.636,79.03
  Bottom Layer w0.254: P1103.3@107.205,85 v1(109.789,85) ; v1(120.805,78.73) U1100.39@122.5,78.73 ; v1(151.955,55.575) U840.13@153.65,55.575 ; U102.19@186.083,54.5 v1(187.778,54.5) ; U101.19@203.083,54.5 v1(205.578,54.5) ; U100.19@220.083,54.5 v1(222.578,54.5)
SigIn00: U800.4 U840.21 | length 40.1
  Bottom Layer w0.254: U840.21@160.55,52.325 167.953,52.325 172.018,48.26 188.179,48.26 190.491,45.948 190.491,41.069 190.925,40.635 U800.4@192.925,40.635
SigIn01: U800.5 U840.22 | length 40.6
  Bottom Layer w0.254: U840.22@160.55,51.675 167.684,51.675 171.719,47.64 187.942,47.64 ; 187.942,47.625 189.847,45.72 189.847,40.449 ; 189.841,40.449 190.925,39.365 U800.5@192.925,39.365
SigIn02: U800.11 U840.23 | length 40.7
  Bottom Layer w0.254: U840.23@160.55,51.025 167.415,51.025 171.45,46.99 187.673,46.99 189.197,45.466 189.197,39.011 ; U800.11@186.275,38.095 188.275,38.095 189.191,39.011
SigIn03: U800.13 U840.24 | length 36.8
  Bottom Layer w0.254: U840.24@160.55,50.375 167.146,50.375 171.181,46.34 187.41,46.34 ; U800.13@186.275,40.635 188.275,40.635 188.547,40.907 ; 187.41,46.334 188.553,45.191 188.553,40.907
SigIn04: U810.4 U840.25 | length 19
  Bottom Layer w0.254: U840.25@160.55,49.725 166.77,49.725 170.504,45.992 ; 170.485,41.069 170.485,45.973 ; 170.491,41.069 170.925,40.635 U810.4@172.925,40.635
SigIn05: U810.5 U840.26 | length 19.5
  Bottom Layer w0.254: U840.26@160.55,49.075 166.501,49.075 169.849,45.728 ; 169.841,45.72 169.841,40.449 170.925,39.365 U810.5@172.925,39.365
SigIn06: U810.11 U840.27 | length 19.6
  Bottom Layer w0.254: U840.27@160.55,48.425 166.232,48.425 169.191,45.466 169.191,39.011 168.275,38.095 U810.11@166.275,38.095
SigIn07: U810.13 U840.28 | length 15.7
  Bottom Layer w0.254: U840.28@160.55,47.775 165.963,47.775 168.547,45.191 ; U810.13@166.275,40.635 168.275,40.635 168.547,40.907 168.547,45.191 ; 168.547,45.2 168.547,45.191
SigIn08: U820.4 U840.1 | length 15.9
  Bottom Layer w0.254: U820.4@147.925,40.635 145.925,40.635 145.491,41.069 145.491,45.004 148.262,47.775 U840.1@153.65,47.775
SigIn09: U820.5 U840.2 | length 18.5
  Bottom Layer w0.254: U820.5@147.925,39.365 145.925,39.365 144.841,40.449 144.841,45.273 147.993,48.425 U840.2@153.65,48.425
SigIn10: U820.11 U840.3 | length 20.7
  Bottom Layer w0.254: U820.11@141.275,38.095 143.275,38.095 144.191,39.011 144.191,45.542 147.724,49.075 U840.3@153.65,49.075
SigIn11: U820.13 U840.4 | length 19
  Bottom Layer w0.254: U820.13@141.275,40.635 143.275,40.635 143.547,40.907 ; 143.541,40.907 143.541,45.811 147.455,49.725 U840.4@153.65,49.725
SigIn12: U830.4 U840.5 | length 37
  Bottom Layer w0.254: U830.4@127.925,40.635 125.925,40.635 125.491,41.069 125.491,45.197 126.634,46.34 143.174,46.34 147.209,50.375 U840.5@153.65,50.375
SigIn13: U830.5 U840.6 | length 39.7
  Bottom Layer w0.254: U830.5@127.925,39.365 125.925,39.365 124.841,40.449 124.841,45.466 126.365,46.99 142.905,46.99 146.94,51.025 U840.6@153.65,51.025
SigIn14: U830.11 U840.7 | length 41.9
  Bottom Layer w0.254: U830.11@121.275,38.095 123.275,38.095 124.191,39.011 124.191,45.735 126.096,47.64 142.636,47.64 146.671,51.675 U840.7@153.65,51.675
SigIn15: U830.13 U840.8 | length 40.2
  Bottom Layer w0.254: U830.13@121.275,40.635 123.275,40.635 123.547,40.907 123.547,46.002 125.829,48.284 142.369,48.284 146.404,52.319 153.644,52.319 U840.8@153.65,52.325
TX: P1101.2 P1102.1 U1100.37 | length 56.2
  MidLayer1 w0.254: v1(110.871,94.996) 112.522,93.345 112.522,84.473 v1(120.805,76.19)
  MidLayer2 w0.254: v1(86.31,94.555) 96.426,94.555 v1(99.411,97.54) 108.327,97.54 v1(110.871,94.996)
  Bottom Layer w0.254: v1(86.31,94.555) P1102.1@86.31,96.655 ; v1(99.411,97.54) P1101.2@101.995,97.54 ; v1(120.805,76.19) U1100.37@122.5,76.19
TXCAN: U900.1 U901.1 | length 6.1
  Bottom Layer w0.254: U901.1@99.9,66.92 101.101,66.92 102.695,65.326 U900.1@102.695,62.7
"USB D+": D1100.5 P1100.A6 P1100.B6 U1100.14 | length 47.6
  MidLayer1 w0.2: v1(141.695,63.49) 141.695,64.801 143.51,66.616 143.51,87.078 148.38,91.948 153.587,91.948 154.1,92.461 P1100.A6@154.1,94.17 154.185,94.255 154.185,94.585 155.015,95.415 155.015,95.735 P1100.B6@155.1,95.82
  Bottom Layer w0.254: U1100.14@140,63.49 v1(141.695,63.49) ; P1100.A6@154.1,94.17 154.1,91.518 154.686,90.932 155.347,90.932 155.575,90.704 D1100.5@155.575,90.192
"USB D-": D1100.1 P1100.A7 P1100.B7 U1100.13 | length 44.8
  MidLayer1 w0.2: v1(142.621,64.77) 144.018,66.167 144.018,86.868 148.59,91.44 153.797,91.44 155.1,92.743 P1100.A7@155.1,94.17
  MidLayer2 w0.254: P1100.B7@154.1,95.82 154.185,95.735 154.185,95.415 155.015,94.585 155.015,94.255 P1100.A7@155.1,94.17
  Bottom Layer w0.254: U1100.13@140,64.76 142.611,64.76 v1(142.621,64.77) ; D1100.1@155.075,91.672 155.075,94.145 P1100.A7@155.1,94.17
V-CAN_H: J900.2 L900.4 R902.1 | length 11.8
  Bottom Layer w0.254: J900.2@102.1,28 102.1,34.25 103.477,35.627 103.602,35.627 103.85,35.875 R902.1@103.85,36 103.85,36.125 103.602,36.373 103.499,36.373 103.35,36.522 L900.4@103.35,38.725
V-CAN_L: J900.1 L900.3 R902.2 | length 11.8
  Bottom Layer w0.254: L900.3@105.85,38.725 105.85,36.522 105.701,36.373 105.598,36.373 105.35,36.125 R902.2@105.35,36 105.35,35.875 105.598,35.627 105.723,35.627 107.1,34.25 J900.1@107.1,28
VBUS: D1101.2 D1102.2 D1103.2 D1104.2 P1100.A4 P1100.A9 P1100.B4 P1100.B9 P1101.1 | length 88.7
  Top Layer w0.254: P1100.A4@152.1,94.17 P1100.B9@152.1,95.82 ; P1100.A9@157.1,94.17 P1100.B4@157.1,95.82
  Top Layer w0.5: P1100.A4@152.1,94.17 152.1,93.518 152.871,92.747 154.579,92.747 156.374,92.747 157.062,93.435 157.062,94.132 P1100.A9@157.1,94.17
  Top Layer w1: 154.579,92.747 154.579,89.156 v1(156.096,87.638) v1(157.1,87.638) v1(158.104,87.638) v1(159.108,87.638)
  MidLayer1 w0.254: v1(144.272,98.425) 151.384,98.425 152.1,97.709 P1100.B9@152.1,95.82
  MidLayer2 w0.254: v1(109.789,97.54) 110.674,98.425 v1(144.272,98.425)
  Bottom Layer w0.254: P1101.1@107.205,97.54 v1(109.789,97.54)
  Bottom Layer w1: v1(156.096,87.638) v1(159.108,87.638) D1104.2@170.85,87.638 D1103.2@173.35,87.638 D1102.2@175.85,87.638 D1101.2@178.35,87.638
pads on no net: P1100.A8 P1100.B8 P1100.M P1104.7 PTH1.1 PTH2.1 PTH3.1 PTH4.1 PTH5.1 PTH6.1 PTH7.1 PTH8.1 S1101.2 S1101.4 U111.15 U800.12 U810.12 U820.12 U830.12 U840.11 U840.14 U840.19 U840.20 U901.3 U901.4 U901.5 U901.6 U901.10 U901.11 U1000.5 U1000.6 U1000.12 U1020.5 U1020.6 U1020.12 U1100.10 U1100.11 U1100.15 U1100.16 U1100.17 U1100.18 U1100.19 U1100.20 U1100.23 U1100.24 U1100.25 U1100.26 U1100.28 U1100.29 U1100.30 U1100.31
copper on no net: | length 1.5
  Bottom Layer w0.2: v1@150.157,68.937 151.636,68.937
  other v1: 150.157,68.952
  other v3: 5,22.333 95,22.333 214.2,22.333 304.2,22.333 2.333,25 7.667,25 92.333,25 97.667,25 211.533,25 216.867,25 301.533,25 306.867,25 5,27.667 95,27.667 214.2,27.667 304.2,27.667 5,96.033 95,96.033 214.2,96.033 304.2,96.033 2.333,98.7 7.667,98.7 92.333,98.7 97.667,98.7 211.533,98.7 216.867,98.7 301.533,98.7 306.867,98.7 5,101.367 95,101.367 214.2,101.367 304.2,101.367

## Polygon pours and split planes (outlines as drawn)
NetC1006_1 on Bottom Layer "NETC1006_1_L04_P025" (solid, remove dead copper, pour order 25): 249.5,40.5 249.5,42.219 249.301,42.418 247.523,42.418 247.142,42.799 247.142,45.72 247.65,46.228 252.349,46.228 252.857,45.72 252.857,42.799 252.476,42.418 250.718,42.418 250.5,42.2 250.5,40.5
GND on Bottom Layer "GND_L04_P034" (solid, pour order 34): 309.2,0 309.2,103.7 0,103.7 0,0
KL31 on Bottom Layer "KL31_L04_P029" (solid, pour order 29): 221.996,22.225 221.996,32.131 220.472,33.655 201.422,33.655 199.6,31.833 199.6,26.17 200.878,24.892 203.342,24.892 204.6,26.15 204.6,28.959 206.121,30.48 208.407,30.48 210.2,28.687 216.662,22.225
KL30 on Bottom Layer "KL30_L04_P028" (solid, pour order 28): 221.996,22.225 221.996,12.065 215.9,12.065 204.6,23.365 204.6,28.959 206.121,30.48 208.407,30.48 210.2,28.687 216.662,22.225
KL30i on Bottom Layer "KL30I_L04_P027" (solid, pour order 27): 221.996,22.225 249.555,22.225 250.825,23.495 250.823,23.497 250.823,27.603 253.321,27.603 253.492,27.432 253.492,23.368 254.635,22.225 269.24,22.225 270.51,23.495 270.51,27.559 272.992,27.559 273.05,27.617 273.05,17.78 267.335,12.065 221.996,12.065
NetC1026_1 on Bottom Layer "NETC1026_1_L04_P026" (solid, remove dead copper, pour order 26): 269.5,40.5 269.5,42.219 269.301,42.418 267.523,42.418 267.142,42.799 267.142,45.72 267.65,46.228 272.349,46.228 272.857,45.72 272.857,42.799 272.476,42.418 270.718,42.418 270.5,42.2 270.5,40.5
KL30i on Bottom Layer "KL30I_L04_P024" (solid, pour order 24): 270,27.75 270.445,27.305 274.255,27.305 274.89,27.94 274.89,35.56 270.953,39.497 270.953,41.5 270,41.5
KL30i on Bottom Layer "KL30I_L04_P023" (solid, pour order 23): 250,27.75 250.445,27.305 254.255,27.305 254.89,27.94 254.89,35.56 250.953,39.497 250.953,41.5 250,41.5
GND on Bottom Layer "GND_L04_P021" (solid, pour order 21): 270,27.75 269.555,27.305 265.745,27.305 265.11,27.94 265.11,35.56 269.047,39.497 269.047,41.5 270,41.5
GND on Bottom Layer "GND_L04_P020" (solid, pour order 20): 250,27.75 249.555,27.305 245.745,27.305 245.11,27.94 245.11,35.56 249.047,39.497 249.047,41.5 250,41.5
GND on Bottom Layer "GND_L04_P019" (solid, remove dead copper, pour order 19): 277.303,57.077 276.456,56.23 273.651,56.23 273,56.881 273,63.865 273.905,64.77 276.414,64.77 277.303,63.881
GND on Bottom Layer "GND_L04_P018" (solid, remove dead copper, pour order 18): 257.303,57.077 256.456,56.23 253.651,56.23 253,56.881 253,63.865 253.905,64.77 256.414,64.77 257.303,63.881
GND on Bottom Layer "GND_L04_P015" (solid, remove dead copper, pour order 15): 262.697,57.077 263.544,56.23 266.349,56.23 267,56.881 267,63.865 266.095,64.77 263.586,64.77 262.697,63.881
GND on Bottom Layer "GND_L04_P010" (solid, remove dead copper, pour order 10): 242.697,57.077 243.544,56.23 246.349,56.23 247,56.881 247,63.865 246.095,64.77 243.586,64.77 242.697,63.881
5V on Bottom Layer "5V_L04_P007" (solid, remove dead copper, pour order 7): 267,54.244 267.523,53.721 272.476,53.721 273,54.245 273,63.992 272.095,64.897 267.904,64.897 267,63.993
3V3 on Bottom Layer "3V3_L04_P006" (solid, remove dead copper, pour order 6): 247,54.117 247.523,53.594 252.476,53.594 253,54.118 253,63.865 252.095,64.77 247.904,64.77 247,63.866
5V on Top Layer "5V_L01_P031" (solid, pour order 31): 309.2,0 309.2,103.7 0,103.7 0,0
3V3 on MidLayer2 "3V3_L03_P033" (solid, pour order 33): 309.2,0 309.2,103.7 0,103.7 0,0
GND on MidLayer1 "GND_L02_P032" (solid, pour order 32): 309.2,0 309.2,103.7 0,103.7 0,0

## Silkscreen, mask and mechanical layers (free items; w line width, h text height)
Top Overlay:
  lines w0.254: 36.931,61.45 36.931,91.8 108.71,91.8 108.71,61.45 36.931,61.45
  text "LADA Niva" at 45.212,78.74 h4.57
  text "4x4 Электро" at 67.693,69.196 h6.5
Bottom Overlay:
  text "RESET" at 138.155,99.238 h1.52
  text "BOOT" at 177.393,99.238 h1.52
  text "SERIAL" at 74.19,94.238 h1.52
  text "SERIAL" at 119.19,94.238 h1.52
  text "G D 5V" at 26.042,91.186 h1.52
  text "JTAG" at 72.793,84.238 h1.52
  text "I2C" at 116.904,84.238 h1.52
  text "3V3" at 252.031,64.738 h1.52
  text "5V" at 271.27,64.738 h1.52
  text "DIGIT-RESET" at 142.471,49.238 h1.52
  text "ADC-RESET" at 181.202,49.238 h1.52
  text "L CAN H" at 109.678,22.353 h1.52
  text "KL31" at 201.338,17.754 h1.52 r270
  text "KL30" at 206.338,17.754 h1.52 r270
Mechanical 1:
  circle w0.254: c16.725,100 r1.5
  circle w0.254: c26.725,100 r1.5
  lines w0.254: 0,0 0,103.7 43.45,103.7 ccw(c51.575,103.7) 59.7,103.7 247.05,103.7 ccw(c255.175,103.7) 263.3,103.7 309.2,103.7 309.2,0 0,0 ; 152.322,31.305 171.133,82.988 176.771,80.936 157.96,29.253 152.322,31.305 ; 171.133,77 241.133,77 241.133,83 171.133,83 171.133,77